# Altium PCB PCB1.PcbDoc
Units mm, origin at the board's own origin, x right, y up, seen from the top; angles counter-clockwise.
Board outline 45.25 x 20.83 mm, 2 copper layers (Top Layer, Bottom Layer); 47 components, 43 nets, 137 pads, 32 vias.
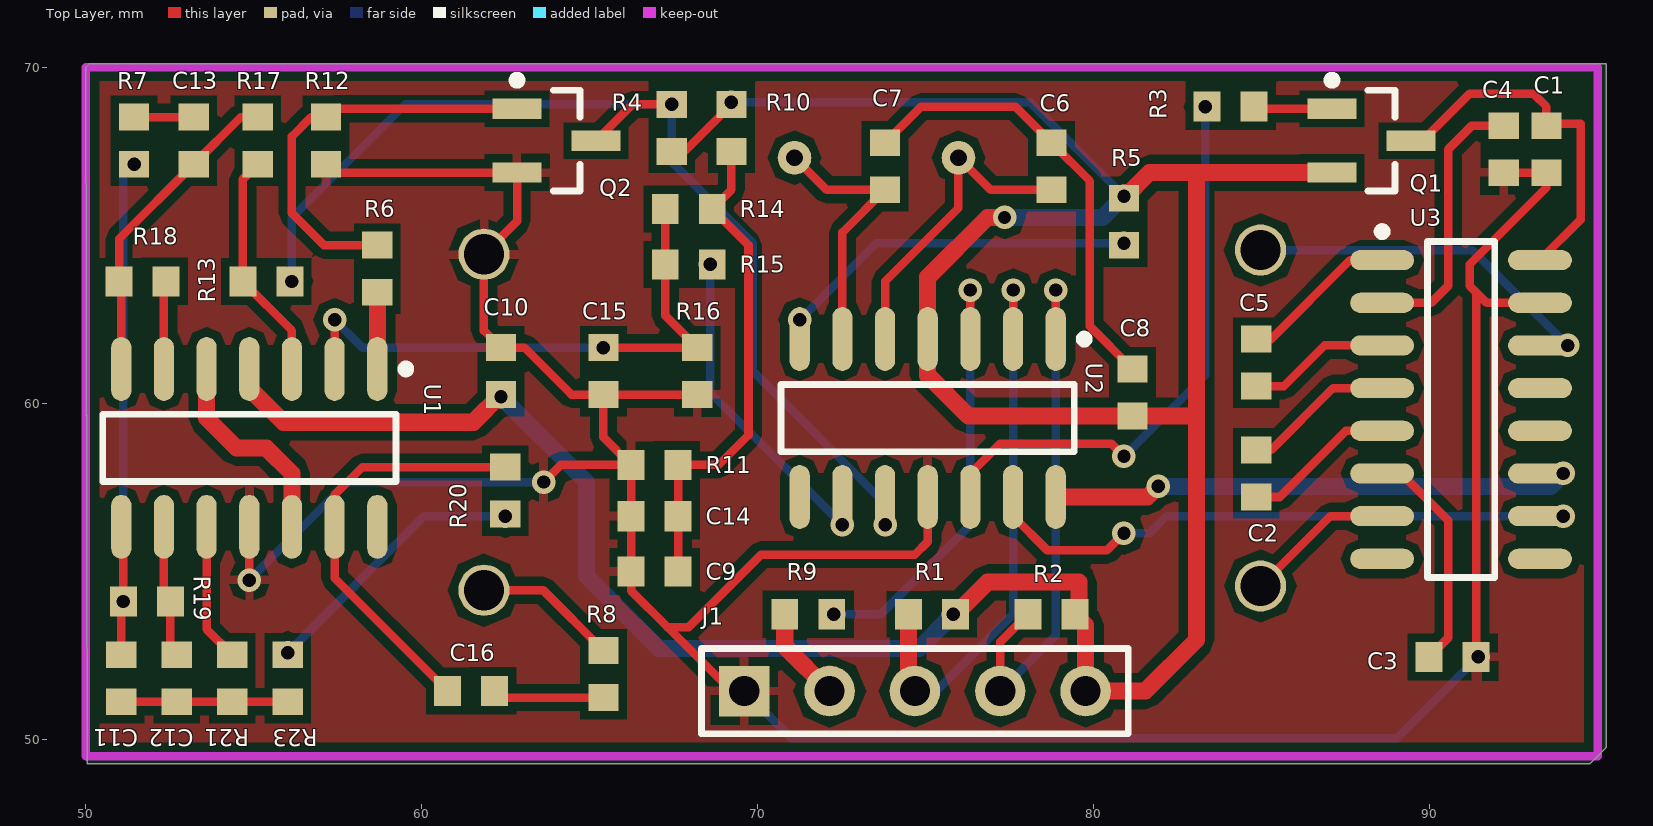
[diagram p0: Top Layer view]
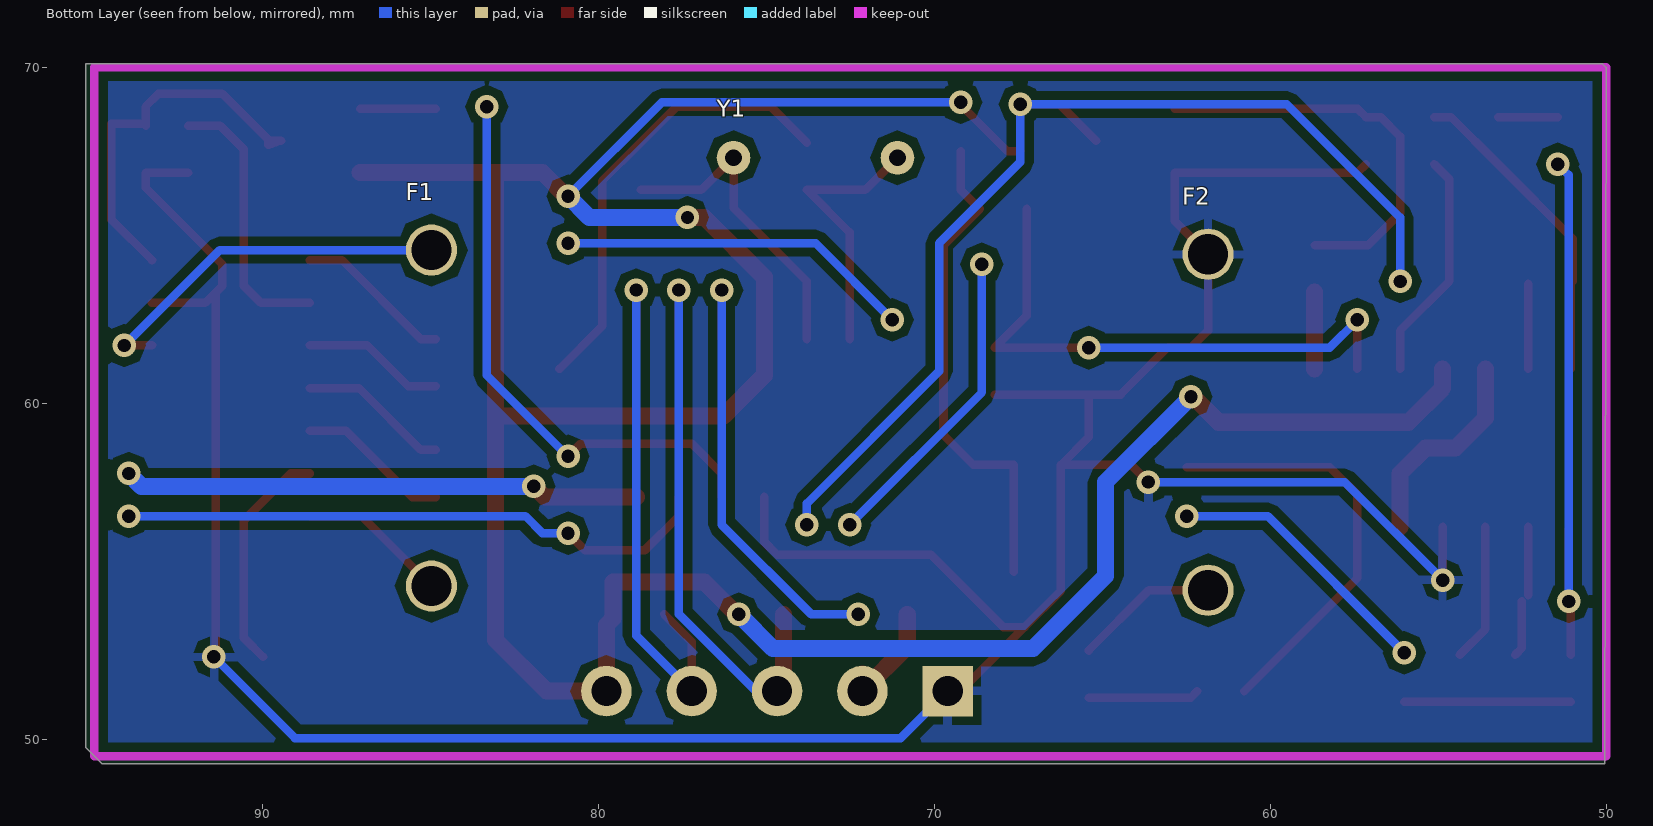
[diagram p1: Bottom Layer view, seen from below]

## Layer stack, top to bottom
Top Layer: signal copper 0.0356
Dielectric: dielectric 0.32, FR-4, Dk 4.8
Bottom Layer: signal copper 0.0356

## Board outline
50,70 50.104,70.104 95.25,70.104 95.25,49.75 95,49.5 94.776,49.276 50.038,49.276

## Design rules (kind name [scope] priority, off if disabled: settings)
Clearance [All] p1: gap=0.254
PolygonConnect [All] p1: connectstyle=Relief reliefconductorwidth=0.254 reliefentries=4 polygonreliefangle="90 Angle"
RoutingVias [All] p1: holewidth=0.711 width=1.27 viastyle="Through Hole" minholewidth=0.711 minwidth=1.27 maxholewidth=0.711 maxwidth=1.27
SilkscreenOverComponentPads [All] p1: minsilkscreentomaskgap=0.254
SolderMaskExpansion [All] p1: expansion=0.102
Width [All] p1: maxlimit=1.27 minlimit=0.254 preferedwidth=0.254
27 further rules are at their usual default settings.

## Components (designator, comment, footprint, x,y, rotation, side; value= is the part's Value field where it differs from the comment)
C1 "Cap" 1608[0603] 93.472,67.564 r90 top
C2 "Cap" 1608[0603] 84.836,57.912 r270 top
C3 "Cap" 1608[0603] 90.678,52.451 r180 top
C4 "Cap" 1608[0603] 92.202,67.564 r270 top
C5 "Cap" 1608[0603] 84.836,61.214 r270 top
C6 "Cap" 1608[0603] 78.74,67.056 r270 top
C7 "Cap" 1608[0603] 73.787,67.056 r90 top
C8 "Cap" 1608[0603] 81.153,60.325 r270 top
C9 "Cap" 1608[0603] 66.929,54.991 r0 top
C10 "Cap" 1608[0603] 62.357,60.96 r270 top
C11 "Cap" 1608[0603] 51.054,51.816 r90 top
C12 "Cap" 1608[0603] 52.705,51.816 r90 top
C13 "Cap" 1608[0603] 53.213,67.818 r270 top
C14 "Cap" 1608[0603] 66.929,56.642 r0 top
C15 "Cap" 1608[0603] 65.405,60.96 r90 top
C16 "Cap" 1608[0603] 61.468,51.435 r180 top
F1 "T" laba 84.963,59.563 r270 bottom
F2 "R" laba 61.849,59.436 r90 bottom
J1 "CON_5" HDR1X5 69.596,51.435 r0 top
Q1 "NPN" SOT-23_M 88.265,67.818 r0 top
Q2 "NPN" SOT-23_M 64.008,67.818 r0 top
R1 "Res1" 1608[0603] 75.184,53.721 r0 top
R2 "Res1" 1608[0603] 78.74,53.721 r0 top
R3 "Res1" 1608[0603] 84.074,68.834 r180 top
R4 "Res1" 1608[0603] 67.437,68.199 r270 top
R5 "Res1" 1608[0603] 80.899,65.405 r90 top
R6 "Res1" 1608[0603] 58.674,64.008 r270 top
R7 "Res1" 1608[0603] 51.435,67.818 r270 top
R8 "Res1" 1608[0603] 65.405,51.943 r270 top
R9 "Res1" 1608[0603] 71.501,53.721 r180 top
R10 "Res1" 1608[0603] 69.215,68.199 r270 top
R11 "Res1" 1608[0603] 66.929,58.166 r180 top
R12 "Res1" 1608[0603] 57.15,67.818 r270 top
R13 "Res1" 1608[0603] 55.372,63.627 r0 top
R14 "Res1" 1608[0603] 67.945,65.786 r180 top
R15 "Res1" 1608[0603] 67.945,64.135 r180 top
R16 "Res1" 1608[0603] 68.199,60.96 r270 top
R17 "Res1" 1608[0603] 55.118,67.818 r90 top
R18 "Res1" 1608[0603] 51.689,63.627 r0 top
R19 "Res1" 1608[0603] 51.816,54.102 r0 top
R20 "Res1" 1608[0603] 62.484,57.404 r90 top
R21 "Res1" 1608[0603] 54.356,51.816 r90 top
R23 "Res1" 1608[0603] 56.007,51.816 r270 top
U1 "TL074" SO_14 54.229,58.674 r270 top
U2 "EM78" SO_14 74.422,59.563 r270 top
U3 "ST202" SO-16_L 90.932,59.817 r0 top
Y1 "4M" jingzhen 73.533,67.31 r180 bottom

## Footprints (in the part's own frame and the unit in brackets; to place one, negate y for a bottom-side part, rotate by r counter-clockwise, add the part's x,y. Pads: shape width x height; smd on the part's side, far side on the other; paste and mask are expansions set on the pad)
1608[0603] [mm] "Chip Capacitor, Body 1.6x0.8mm, IPC High Density"
  rect 0.8x0.9 smd: 1(-0.7,0) 2(0.7,0)
  body extent -0.87,-0.48 0.87,0.48, height 1.3
HDR1X5 [mm] "Connector; Header; 5 Position"
  rect 1.5x1.5 hole 0.9: 1(0,0)
  round 1.5 hole 0.9: 2(2.54,0) 3(5.08,0) 4(7.62,0) 5(10.16,0)
  silkscreen extent -1.27,-1.27 11.43,1.27
jingzhen [mm]
  round 1 hole 0.5: 1(-2.44,0) 2(2.44,0)
laba [mm]
  round 1.524 hole 1.2: 1(-5,0) 2(5,0)
SO-16_L [mm] "SOIC, 16-Leads, Body 9.9x3.9mm, Pitch 1.27mm, IPC High Density"
  oval 1.9x0.6 smd: 1(-2.35,4.445) 2(-2.35,3.175) 3(-2.35,1.905) 4(-2.35,0.635) 5(-2.35,-0.635) 6(-2.35,-1.905) 7(-2.35,-3.175) 8(-2.35,-4.445) 9(2.35,-4.445) 10(2.35,-3.175) 11(2.35,-1.905) 12(2.35,-0.635) 13(2.35,0.635) 14(2.35,1.905) 15(2.35,3.175) 16(2.35,4.445)
  silkscreen extent -2.47,-5 1,5.42, body extent -2,-5 2,5, height 1.75
SO_14 [mm]
  oval 1.9x0.6 smd: 1(-2.35,4.445) 2(-2.35,3.175) 3(-2.35,1.905) 4(-2.35,0.635) 5(-2.35,-0.635) 6(-2.35,-1.905) 7(-2.35,-3.175) 8(2.35,-3.175) 9(2.35,-1.905) 10(2.35,-0.635) 11(2.35,0.635) 12(2.35,1.905) 13(2.35,3.175) 14(2.35,4.445)
  silkscreen extent -2.47,-3.73 1,5.42, body extent -2,-3.71 2.01,5, height 1.75
SOT-23_M [mm] "SOT23, 3-Leads, Body 2.9x1.3mm, Pitch 0.95mm, Lead Span 2.5mm, IPC Low Density"
  rect 1.45x0.6 smd: 1(-1.175,0.95) 2(-1.175,-0.95) 3(1.175,0)
  silkscreen extent -1.3,-1.5 0.7,1.92, body extent -0.7,-1.5 0.7,1.5, height 1.1

## Part data
C1 C2 C3 C4 C5 C6 C7 C8 C9 C10 C11 C12 C13 C14 C15 C16: "Capacitor"
F1 F2: library part Speaker
J1: library part "Header 5", "Header, 5-Pin"
Q1 Q2: "NPN Bipolar Transistor"
R1 R2 R3 R4 R5 R6 R7 R8 R9 R10 R11 R12 R13 R14 R15 R16 R17 R18 R19 R20 R21 R23: "Resistor"
Y1: library part XTAL, "Cryst"

## Via types
v1: diameter 0.7, hole 0.4, Top Layer to Bottom Layer, 32 vias

## Nets (pads, with @x,y where several pads share a name; then routed paths per layer and width w, separated by ;. In a path a pad name is that pad's centre, name@x,y a point inside that pad or via, vN(x,y) a via of type N, cw(c..) or ccw(c..) an arc to the next point about the centre after c; other vN are vias at no path point)
1/2VCC: U1.5 U1.12 | length 6.3
  Top Layer w0.508: U1.5 53.594,59.563 54.483,58.674 55.372,58.674 56.134,57.912 U1.12
ECHO: J1.3 R1.1 U2.2 | length 17.3
  Top Layer w0.254: U2.2 v1(77.597,63.373)
  Top Layer w0.508: R1.1 74.484,51.627 J1.3
  Bottom Layer w0.254: J1.3 75.311,51.435 77.597,53.721 v1(77.597,63.373)
GND: C1.1 C3.1 C4.2 C9.1 C10.1 C14.1 C15.1 F2.2 J1.1 Q2.2 R11.2 R12.2 R16.2 U1.11 U2.11 U3.15 | length 94.7
  Top Layer w0.254: v1(54.864,54.737) U1.11 ; R12.2 57.4,66.868 Q2.2 62.833,65.42 F2.2 61.849,62.168 C10.1 63.054,61.66 64.454,60.26 C15.1 ; v1(63.627,57.658) 64.135,58.166 R11.2 ; R16.2 C15.1 ; J1.1@68.961,51.689 67.31,53.34 ; U2.11 75.057,55.88 74.676,55.499 70.104,55.499 67.945,53.34 67.31,53.34 ; C3.1 91.378,63.308 ; C4.2 C1.1 93.472,66.421 91.186,64.135 91.186,63.5 91.378,63.308 ; U3.15 91.694,62.992 91.378,63.308 ; C15.1 65.405,58.99 R11.2 ; R11.2 C14.1 C9.1 66.229,54.421 67.31,53.34
  Bottom Layer w0.254: v1(54.864,54.737) 57.785,57.658 v1(63.627,57.658) ; J1.1 70.993,50.038 89.027,50.038 v1(91.44,52.451)
NetC1_2: C1.2 Q1.3 U3.16 | length 11.4
  Top Layer w0.254: Q1.3@89.789,67.818 Q1.3 89.821,67.691 89.821,67.85 91.186,69.215 93.091,69.215 93.472,68.834 C1.2 ; U3.16 94.492,65.472 94.492,68.322 C1.2@93.53,68.322
NetC2_1: C2.1 U3.4 | length 4.5
  Top Layer w0.254: C2.1 85.282,58.612 87.122,60.452 U3.4
NetC2_2: C2.2 U3.5 | length 4.6
  Top Layer w0.254: C2.2 85.533,57.212 87.503,59.182 U3.5
NetC3_2: C3.2 U3.6 | length 6.8
  Top Layer w0.254: U3.6 89.154,57.912 90.551,56.515 90.551,53.024 C3.2
NetC4_1: C4.1 U3.2 | length 8.2
  Top Layer w0.254: U3.2 90.043,62.992 90.551,63.5 90.551,67.564 91.251,68.264 C4.1
NetC5_1: C5.1 U3.1 | length 4.7
  Top Layer w0.254: C5.1 85.282,61.914 87.63,64.262 U3.1
NetC5_2: C5.2 U3.3 | length 4.2
  Top Layer w0.254: C5.2 85.66,60.514 86.868,61.722 U3.3
NetC6_1: C6.1 C7.2 C8.1 | length 13.6
  Top Layer w0.254: C7.2 74.865,68.834 77.662,68.834 C6.1 79.883,66.613 79.883,62.295 C8.1
NetC6_2: C6.2 U2.5 Y1.1 | length 9.5
  Top Layer w0.254: U2.5 73.787,63.627 75.973,65.813 Y1.1 76.927,66.356 C6.2
NetC9_2: C9.2 C14.2 R10.2 R11.1 R14.1 | length 14.8
  Top Layer w0.254: C9.2 R11.1 68.834,58.166 69.723,59.055 69.723,64.708 R14.1 69.215,66.356 R10.2
NetC11_1: C11.1 C12.1 R21.1 R23.2 | length 5
  Top Layer w0.254: C11.1 C12.1 R21.1 R23.2
NetC11_2: C11.2 R7.2 R19.1 U1.8 | length 16.8
  Top Layer w0.254: C11.2 R19.1@51.054,54.04 ; v1(51.116,54.102) U1.8@51.116,56.262
  Bottom Layer w0.254: v1(51.116,54.102) 51.116,66.799 v1(51.435,67.118)
NetC12_2: C12.2 R19.2 U1.9 | length 3.7
  Top Layer w0.254: R19.2@52.324,54.294 U1.9 ; R19.2 52.516,52.705 C12.2
NetC13_1: C13.1 R7.1 | length 1.8
  Top Layer w0.254: R7.1 C13.1
NetC13_2: C13.2 R17.2 R18.1 U1.7 | length 9.4
  Top Layer w0.254: R18.1 50.989,64.894 C13.2 54.613,68.518 R17.2 ; U1.7 R18.1@51.054,63.562
NetC15_2: C15.2 R14.2 R15.2 R16.1 U1.2 | length 17.1
  Top Layer w0.254: U1.2 v1(57.404,62.484) ; v1(65.405,61.66) R16.1 67.245,62.614 R15.2 R14.2
  Bottom Layer w0.254: v1(57.404,62.484) 58.228,61.66 v1(65.405,61.66)
NetC16_1: C16.1 R8.2 | length 3.3
  Top Layer w0.254: C16.1 62.36,51.243 R8.2
NetC16_2: C16.2 R20.2 U1.13 | length 12.7
  Top Layer w0.254: C16.2 57.404,54.799 U1.13 57.404,57.277 58.231,58.104 R20.2
NetF1_1: F1.1 U3.14 | length 11.1
  Top Layer w0.254: U3.14 v1(94.107,61.722)
  Bottom Layer w0.254: F1.1 91.266,64.563 v1(94.107,61.722)
NetF1_2: F1.2 U3.7 | length 4.5
  Top Layer w0.254: F1.2 87.042,56.642 U3.7
NetF2_1: F2.1 R8.1 | length 4.3
  Top Layer w0.254: F2.1 63.612,54.436 R8.1
NetQ1_2: Q1.1 R3.1 | length 2.3
  Top Layer w0.254: R3.1@84.84,68.768 Q1.1
NetQ2_2: Q2.1 R6.1 R12.1 | length 12.3
  Top Layer w0.254: R6.1 57.085,64.708 56.134,65.659 56.134,67.945 56.707,68.518 R12.1 57.4,68.768 Q2.1
NetR6_2: R6.2 U1.1 | length 2.3
  Top Layer w0.508: U1.1 R6.2
NetR9_1: R9.1 U2.3 | length 13.6
  Top Layer w0.254: U2.3 v1(76.327,63.373)
  Bottom Layer w0.254: v1(72.263,53.721) 73.66,53.721 76.327,56.388 v1(76.327,63.373)
NetR13_1: R13.1 R17.1 U1.3 | length 6.9
  Top Layer w0.254: R17.1 54.672,66.672 R13.1 56.134,62.165 U1.3
NetR18_2: R18.2 U1.6 | length 2.5
  Top Layer w0.254: U1.6 R18.2@52.324,63.562
NetR20_1: R20.1 R23.1 | length 8.2
  Bottom Layer w0.254: v1(56.007,52.578) 60.071,56.642 v1(62.484,56.642)
NetR21_2: R21.2 U1.10 | length 4.1
  Top Layer w0.254: U1.10 53.594,53.278 R21.2
OUT: J1.2 R9.2 | length 3.1
  Top Layer w0.508: R9.2 70.801,52.77 J1.2 ; J1.2@72.136,51.689 J1.2@72.136,51.943
P00: Q2.3 R4.1 R13.2 U2.10 | length 32.4
  Top Layer w0.254: Q2.3 66.264,68.899 v1(67.437,68.899)
  Bottom Layer w0.254: v1(56.134,63.627) 56.134,65.532 59.501,68.899 v1(67.437,68.899) 67.437,67.183 69.85,64.77 69.85,60.96 73.787,57.023 v1(73.787,56.388)
P10: R15.1 U2.9 | length 9.4
  Bottom Layer w0.254: v1(68.58,64.135) 68.58,60.325 v1(72.517,56.388)
P11: R5.1 U2.7 | length 10.6
  Bottom Layer w0.254: v1(71.247,62.484) 73.533,64.77 v1(80.899,64.77)
P12: C7.1 U2.6 Y1.2 | length 8.1
  Top Layer w0.254: Y1.2 72.047,66.356 C7.1 72.517,65.086 U2.6
P22: J1.4 R2.1 U2.1 | length 16.7
  Top Layer w0.254: J1.4 77.216,52.897 R2.1 ; U2.1 v1(78.867,63.373)
  Bottom Layer w0.254: J1.4 78.867,53.086 v1(78.867,63.373)
P23: U2.14 U3.11 | length 15.4
  Top Layer w0.508: U2.14 81.597,57.213 v1(81.915,57.531)
  Bottom Layer w0.508: v1(81.915,57.531) 90.551,57.531 93.599,57.531 v1(93.98,57.912)
P24: U2.13 U3.10 | length 17.8
  Top Layer w0.254: U2.13 77.597,56.642 78.613,55.626 80.391,55.626 v1(80.899,56.134)
  Bottom Layer w0.254: v1(80.899,56.134) 81.661,56.134 82.169,56.642 v1(93.98,56.642)
P25: R3.2 U2.12 | length 17.2
  Top Layer w0.254: U2.12 76.327,57.912 77.216,58.801 80.518,58.801 v1(80.899,58.42)
  Bottom Layer w0.254: v1(80.899,58.42) 83.312,60.833 v1(83.312,68.834)
P54: U2.8
VCC: C8.2 C10.2 J1.5 Q1.2 R1.2 R2.2 R4.2 R5.2 R10.1 U1.4 U2.4 | length 92.6
  Top Layer w0.254: R4.2 67.815,67.499 R10.1
  Top Layer w0.508: U1.4 54.864,60.452 55.88,59.436 61.533,59.436 C10.2 ; R1.2 76.842,54.679 79.56,54.679 79.56,53.601 79.756,53.405 J1.5 81.534,51.435 83.058,52.959 83.058,66.868 ; v1(77.343,65.532) 76.835,65.532 75.057,63.754 U2.4 75.057,60.833 76.265,59.625 C8.2 83.024,59.625 ; R5.2 81.662,66.868 83.058,66.868 ; Q1.2 83.058,66.868
  Bottom Layer w0.254: v1(69.215,68.961) 78.105,68.961 v1(80.899,66.167)
  Bottom Layer w0.508: v1(62.357,60.198) 64.897,57.658 64.897,54.864 67.056,52.705 74.803,52.705 v1(75.819,53.721) ; v1(77.343,65.532) 80.264,65.532 v1(80.899,66.167)
pads on no net: U1.14 U3.8 U3.9 U3.12 U3.13

## Polygon pours and split planes (outlines as drawn)
GND on Top Layer "Top Layer-No Net" (solid, pour order 2): 50,70 95,70 95,49.5 50,49.5
GND on Bottom Layer "Top Layer-No Net" (solid, pour order 4): 50,70 95,70 94.869,69.869 94.869,49.657 50.157,49.657 50,49.5

## Keep-outs
Keep-Out Layer:
  lines w0.254: 50,49.5 50,70 95,70 95,49.5 50,49.5